# EAGLE board rfv1_multiple (EAGLE 6.5.0)
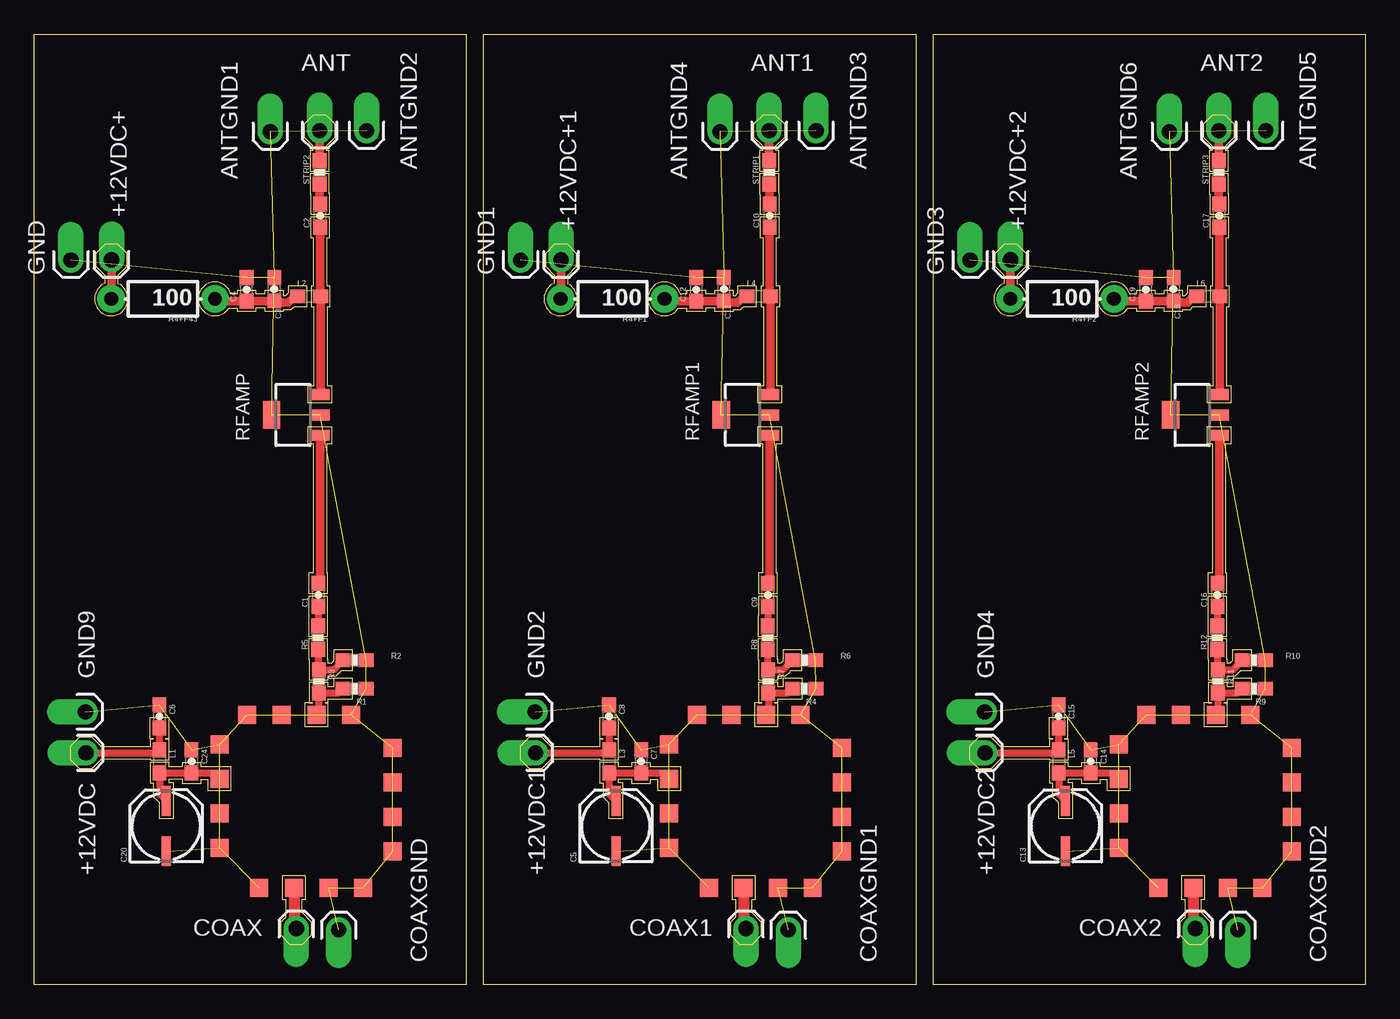
[diagram p0: board, top side]

Size 97.79 x 69.85 mm. Coordinates in mm from the lower left corner, seen from the top.
Outline: 31.75,0 0,0 0,69.85 31.75,69.85 31.75,0
Outline: 64.77,0 33.02,0 33.02,69.85 64.77,69.85 64.77,0
Outline: 97.79,0 66.04,0 66.04,69.85 97.79,69.85 97.79,0
Copper layers (1*16): Top 0.035mm / dielectric 1.5mm / Bottom 0.035mm
Design rules "default": minimum track width 10mil, minimum drill 24mil, track to track 8mil, track to pad 8mil, pad to pad 8mil, via to via 8mil, smd to smd 8mil, copper to edge 40mil, drill to drill 8mil, minimum pad ring 10mil, minimum via ring 8mil, stop-mask expansion 4mil, vias tented up to drill 0mil, thermal gap 10mil
Milling: 687 lines

## Footprints (pad centres in the part's own frame; a part is rotated, then mirrored left to right if it is on the bottom)
1X01_OFFSET = drill 1.118 pad 1.88 offset: 1 0,0
0603-CAP = smd 1.1 x 1: 1 -0.85,0; 2 0.85,0
PANASONIC_C = smd 2.2 x 0.65: + 1.9,-0.2; - -1.8,-0.2
0603 = smd 1.1 x 1: 1 -0.85,0; 2 0.85,0
0603-RES = smd 1.1 x 1: 1 -0.85,0; 2 0.85,0
AXIAL-0.3-KIT = drill 1.016 pad 2.032: P$1 -3.81,0; P$2 3.81,0
SOT89 = smd 0.8 x 1.4: 1 -1.499,-1.981; 2 0,-1.981; 3 1.499,-1.981 | smd 2.032 x 1.27: 4 0,1.575
CVCO55CL = smd 1.32 x 1.32: P$1 2.921,0; P$2 5.461,0; P$3 8.001,0; P$4 10.541,0; P$5 12.7,2.667; P$6 12.7,5.207; P$7 12.7,7.747; P$8 12.7,10.287; P$9 9.652,12.7; P$10 7.112,12.7; P$11 4.572,12.7; P$12 2.032,12.7; P$13 0,10.541; P$14 0,8.001; P$15 0,5.461; P$16 0,2.921

## Placement (x,y rotation side)
+12VDC  [1X01_OFFSET]  3.81,17.04 90 top
+12VDC1  [1X01_OFFSET]  36.83,17.04 90 top
+12VDC2  [1X01_OFFSET]  69.85,17.04 90 top
+12VDC+  [1X01_OFFSET]  5.69,53.26 0 top
+12VDC+1  [1X01_OFFSET]  38.71,53.26 0 top
+12VDC+2  [1X01_OFFSET]  71.73,53.26 0 top
ANT  [1X01_OFFSET]  20.98,62.76 0 top
ANT1  [1X01_OFFSET]  54,62.76 0 top
ANT2  [1X01_OFFSET]  87.02,62.76 0 top
ANTGND1  [1X01_OFFSET]  17.35,62.67 0 top
ANTGND2  [1X01_OFFSET]  24.42,62.74 0 top
ANTGND3  [1X01_OFFSET]  57.44,62.74 0 top
ANTGND4  [1X01_OFFSET]  50.37,62.67 0 top
ANTGND5  [1X01_OFFSET]  90.46,62.74 0 top
ANTGND6  [1X01_OFFSET]  83.39,62.67 0 top
C1  68pF  [0603-CAP]  20.88,28.65 90 top
C2  68pF  [0603-CAP]  21.01,56.51 90 top
C3  68pF  [0603-CAP]  17.64,51.1 90 top
C4  0.01uF  [0603-CAP]  15.62,51.09 90 top
C5  10uF  [PANASONIC_C]  42.54,11.63 90 top
C6  0.1uF  [0603-CAP]  9.21,19.73 270 top
C7  0.1uF  [0603-CAP]  44.59,16.41 270 top
C8  0.1uF  [0603-CAP]  42.23,19.73 270 top
C9  68pF  [0603-CAP]  53.9,28.65 90 top
C10  68pF  [0603-CAP]  54.03,56.51 90 top
C11  68pF  [0603-CAP]  50.66,51.1 90 top
C12  0.01uF  [0603-CAP]  48.64,51.09 90 top
C13  10uF  [PANASONIC_C]  75.56,11.63 90 top
C14  0.1uF  [0603-CAP]  77.61,16.41 270 top
C15  0.1uF  [0603-CAP]  75.25,19.73 270 top
C16  68pF  [0603-CAP]  86.92,28.65 90 top
C17  68pF  [0603-CAP]  87.05,56.51 90 top
C18  68pF  [0603-CAP]  83.68,51.1 90 top
C19  0.01uF  [0603-CAP]  81.66,51.09 90 top
C20  10uF  [PANASONIC_C]  9.52,11.63 90 top
C24  0.1uF  [0603-CAP]  11.57,16.41 270 top
COAX  [1X01_OFFSET]  19.26,4.14 180 top
COAX1  [1X01_OFFSET]  52.28,4.14 180 top
COAX2  [1X01_OFFSET]  85.3,4.14 180 top
COAXGND  GND  [1X01_OFFSET]  22.37,4.06 180 top
COAXGND1  GND  [1X01_OFFSET]  55.39,4.06 180 top
COAXGND2  GND  [1X01_OFFSET]  88.41,4.06 180 top
GND  [1X01_OFFSET]  2.71,53.25 0 top
GND1  [1X01_OFFSET]  35.73,53.25 0 top
GND2  [1X01_OFFSET]  36.79,20.06 90 top
GND3  [1X01_OFFSET]  68.75,53.25 0 top
GND4  [1X01_OFFSET]  69.81,20.06 90 top
GND9  [1X01_OFFSET]  3.77,20.06 90 top
L1  10uh  [0603]  9.22,16.43 270 top
L2  27nH  [0603]  20.21,50.57 0 top
L3  10uh  [0603]  42.24,16.43 270 top
L4  27nH  [0603]  53.23,50.57 0 top
L5  10uh  [0603]  75.26,16.43 270 top
L6  27nH  [0603]  86.25,50.57 0 top
R1  220  [0603-RES]  23.55,21.76 180 top
R2  220  [0603-RES]  23.54,23.85 180 top
R3  24  [0603-RES]  20.91,22.3 270 top
R4  220  [0603-RES]  56.57,21.76 180 top
R4+F1  100  [AXIAL-0.3-KIT]  42.49,50.39 180 top
R4+F2  100  [AXIAL-0.3-KIT]  75.51,50.39 180 top
R4+F43  100  [AXIAL-0.3-KIT]  9.47,50.39 180 top
R5  strip1  [0603-RES]  20.87,25.5 90 top
R6  220  [0603-RES]  56.56,23.85 180 top
R7  24  [0603-RES]  53.93,22.3 270 top
R8  strip1  [0603-RES]  53.89,25.5 90 top
R9  220  [0603-RES]  89.59,21.76 180 top
R10  220  [0603-RES]  89.58,23.85 180 top
R11  24  [0603-RES]  86.95,22.3 270 top
R12  strip1  [0603-RES]  86.91,25.5 90 top
RFAMP  AG603-89  [SOT89]  19.02,41.87 90 top
RFAMP1  AG603-89  [SOT89]  52.04,41.87 90 top
RFAMP2  AG603-89  [SOT89]  85.06,41.87 90 top
STRIP1  strip1  [0603-RES]  54,59.69 90 top
STRIP2  strip1  [0603-RES]  20.98,59.69 90 top
STRIP3  strip1  [0603-RES]  87.02,59.69 90 top
U$1  CVCO55CL  [CVCO55CL]  13.63,7.14 0 top
U$2  CVCO55CL  [CVCO55CL]  46.65,7.14 0 top
U$3  CVCO55CL  [CVCO55CL]  79.67,7.14 0 top

## Library data of the parts
+12VDC +12VDC1 +12VDC2 +12VDC+ +12VDC+1 +12VDC+2 ANT ANT1 ANT2 ANTGND1-ANTGND6 COAX COAX1 COAX2 COAXGND COAXGND1 COAXGND2 GND GND1-GND4 GND9 = SparkFun-Connectors
C1-C5 C9-C13 C16-C20 = SparkFun-Capacitors
C6-C8 C14 C15 C24 L1-L6 R1-R4 R6 R7 R9-R11 = SparkFun-Passives
R4+F1 R4+F2 R4+F43 = SparkFun-Resistors
R5 R8 R12 STRIP1-STRIP3 = SparkFun-Resistors; PROD_ID: RES-10055
RFAMP RFAMP1 RFAMP2 = mini-circuits
U$1-U$3 = crystec_vco

## Nets
GND: ANTGND1.1 ANTGND2.1 C3.2 C4.2 C6.1 C20.- C24.1 COAXGND.1 GND9.1 GND.1 R1.1 R2.1 RFAMP.2 RFAMP.4 U$1.P$1 U$1.P$3 U$1.P$4 U$1.P$5 U$1.P$6 U$1.P$7 U$1.P$8 U$1.P$9 U$1.P$11 U$1.P$12 U$1.P$13 U$1.P$15 U$1.P$16
GND1: ANTGND3.1 ANTGND4.1 C5.- C7.1 C8.1 C11.2 C12.2 COAXGND1.1 GND1.1 GND2.1 R4.1 R6.1 RFAMP1.2 RFAMP1.4 U$2.P$1 U$2.P$3 U$2.P$4 U$2.P$5 U$2.P$6 U$2.P$7 U$2.P$8 U$2.P$9 U$2.P$11 U$2.P$12 U$2.P$13 U$2.P$15 U$2.P$16
GND2: ANTGND5.1 ANTGND6.1 C13.- C14.1 C15.1 C18.2 C19.2 COAXGND2.1 GND3.1 GND4.1 R9.1 R10.1 RFAMP2.2 RFAMP2.4 U$3.P$1 U$3.P$3 U$3.P$4 U$3.P$5 U$3.P$6 U$3.P$7 U$3.P$8 U$3.P$9 U$3.P$11 U$3.P$12 U$3.P$13 U$3.P$15 U$3.P$16
N$1: COAX.1 U$1.P$2
N$2: R1.2 R3.2 U$1.P$10
N$3: R2.2 R3.1 R5.1
N$4: C1.2 RFAMP.1
N$5: C2.1 L2.2 RFAMP.3
N$6: C3.1 C4.1 L2.1 R4+F43.P$1
N$7: +12VDC.1 C6.2 L1.1
N$8: +12VDC+.1 R4+F43.P$2
N$9: C2.2 STRIP2.1
N$10: ANT.1 STRIP2.2
N$11: C1.1 R5.2
N$12: C5.+ C7.2 L3.2 U$2.P$14
N$13: COAX1.1 U$2.P$2
N$14: R4.2 R7.2 U$2.P$10
N$15: R6.2 R7.1 R8.1
N$16: C9.2 RFAMP1.1
N$17: C10.1 L4.2 RFAMP1.3
N$18: C11.1 C12.1 L4.1 R4+F1.P$1
N$19: +12VDC1.1 C8.2 L3.1
N$20: +12VDC+1.1 R4+F1.P$2
N$21: C10.2 STRIP1.1
N$22: ANT1.1 STRIP1.2
N$23: C9.1 R8.2
N$24: C13.+ C14.2 L5.2 U$3.P$14
N$25: COAX2.1 U$3.P$2
N$26: R9.2 R11.2 U$3.P$10
N$27: R10.2 R11.1 R12.1
N$28: C16.2 RFAMP2.1
N$29: C17.1 L6.2 RFAMP2.3
N$30: C18.1 C19.1 L6.1 R4+F2.P$1
N$31: +12VDC2.1 C15.2 L5.1
N$32: +12VDC+2.1 R4+F2.P$2
N$33: C17.2 STRIP3.1
N$34: ANT2.1 STRIP3.2
N$35: C16.1 R12.2
N$37: C20.+ C24.2 L1.2 U$1.P$14

## Tracks (layer width: path | path; a pad name or v marks a point on that pad's centre or on a via)
GND  (26 unrouted)
GND1  (26 unrouted)
GND2  (26 unrouted)
N$1
  Top 0.813: U$1.P$2 19.09,4.31 COAX.1
N$2
  Top 0.508: U$1.P$10 20.91,20 R3.2 22.39,21.45 R1.2
N$3
  Top 0.508: R2.2 21.99,23.15 R3.1 20.87,23.19 R5.1
N$4
  Top 0.61: RFAMP.1 21,29.62 C1.2
N$5
  Top 0.61: RFAMP.3 21.06,43.43 L2.2 21.01,50.61 C2.1
N$6
  Top 0.61: L2.1 19.12,50.57 18.66,50.11 17.79,50.11 C3.1 C4.1 13.43,50.24 R4+F43.P$1
N$7
  Top 0.508: C6.2 9.21,17.3 L1.1 8.99,17.05 +12VDC.1
N$8
  Top 0.61: +12VDC+.1 5.69,50.42 R4+F43.P$2
N$9
  Top 0.61: STRIP2.1 20.98,57.39 C2.2
N$10
  Top 0.61: ANT.1 STRIP2.2
N$11
  Top 0.508: C1.1 20.88,26.37 R5.2
N$12
  Top 0.305: L3.2 42.36,15.46 42.36,15.6 42.35,15.61 42.29,15.61 L3.2 42.3,15.57
  Top 0.508: L3.2 42.24,14.02 C5.+ | 42.36,15.6 42.32,15.6 42.29,15.57 44.58,15.57 C7.2 46.23,15.56 U$2.P$14
N$13
  Top 0.813: U$2.P$2 52.11,4.31 COAX1.1
N$14
  Top 0.508: U$2.P$10 53.93,20 R7.2 55.41,21.45 R4.2
N$15
  Top 0.508: R6.2 55.01,23.15 R7.1 53.89,23.19 R8.1
N$16
  Top 0.61: RFAMP1.1 54.02,29.62 C9.2
N$17
  Top 0.61: RFAMP1.3 54.08,43.43 L4.2 54.03,50.61 C10.1
N$18
  Top 0.61: L4.1 52.14,50.57 51.68,50.11 50.8,50.11 C11.1 C12.1 46.45,50.24 R4+F1.P$1
N$19
  Top 0.508: C8.2 42.23,17.3 L3.1 42.01,17.05 +12VDC1.1
N$20
  Top 0.61: +12VDC+1.1 38.71,50.42 R4+F1.P$2
N$21
  Top 0.61: STRIP1.1 54,57.39 C10.2
N$22
  Top 0.61: ANT1.1 STRIP1.2
N$23
  Top 0.508: C9.1 53.9,26.37 R8.2
N$24
  Top 0.305: L5.2 75.38,15.46 75.38,15.6 75.37,15.61 75.31,15.61 L5.2 75.32,15.57
  Top 0.508: L5.2 75.26,14.02 C13.+ | 75.38,15.6 75.34,15.6 75.31,15.57 77.59,15.57 C14.2 79.25,15.56 U$3.P$14
N$25
  Top 0.813: U$3.P$2 85.13,4.31 COAX2.1
N$26
  Top 0.508: U$3.P$10 86.95,20 R11.2 88.43,21.45 R9.2
N$27
  Top 0.508: R10.2 88.03,23.15 R11.1 86.91,23.19 R12.1
N$28
  Top 0.61: RFAMP2.1 87.04,29.62 C16.2
N$29
  Top 0.61: RFAMP2.3 87.1,43.43 L6.2 87.05,50.61 C17.1
N$30
  Top 0.61: L6.1 85.16,50.57 84.7,50.11 83.83,50.11 C18.1 C19.1 79.47,50.24 R4+F2.P$1
N$31
  Top 0.508: C15.2 75.25,17.3 L5.1 75.03,17.05 +12VDC2.1
N$32
  Top 0.61: +12VDC+2.1 71.73,50.42 R4+F2.P$2
N$33
  Top 0.61: STRIP3.1 87.02,57.39 C17.2
N$34
  Top 0.61: ANT2.1 STRIP3.2
N$35
  Top 0.508: C16.1 86.92,26.37 R12.2
N$37
  Top 0.305: L1.2 9.34,15.46 9.34,15.6 9.33,15.61 9.27,15.61 L1.2 9.28,15.57
  Top 0.508: L1.2 9.22,14.02 C20.+ | 9.34,15.6 9.3,15.6 9.27,15.57 11.55,15.57 C24.2 13.21,15.56 U$1.P$14